# Allegro board IRCAM-1.brd
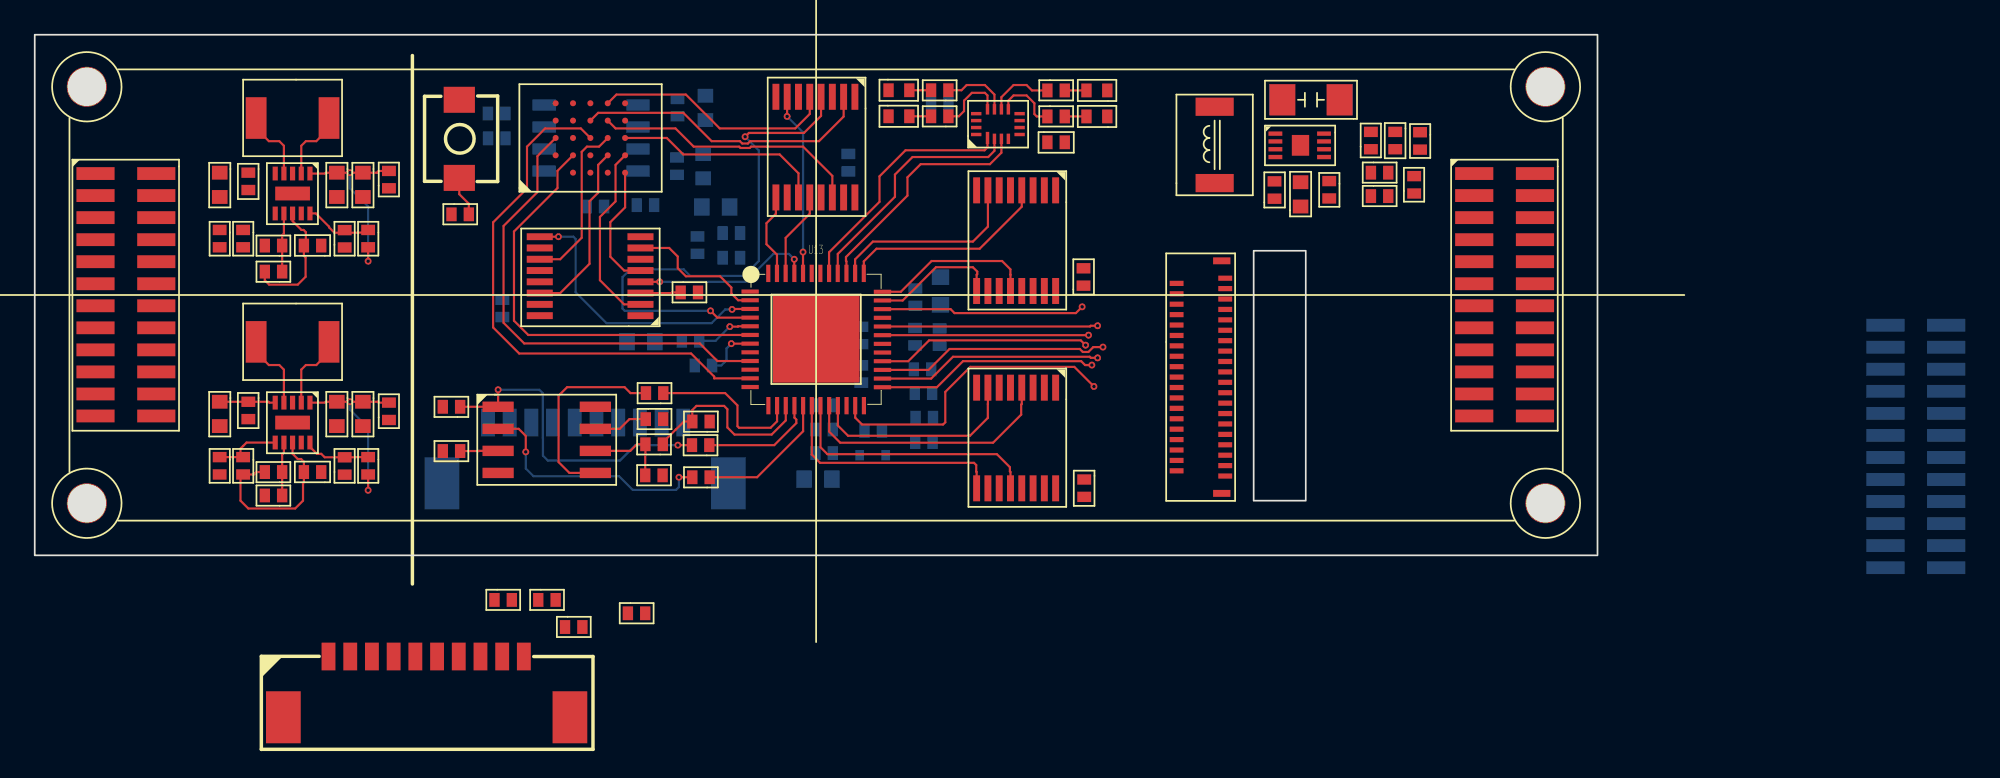
[diagram p0: board, top side]
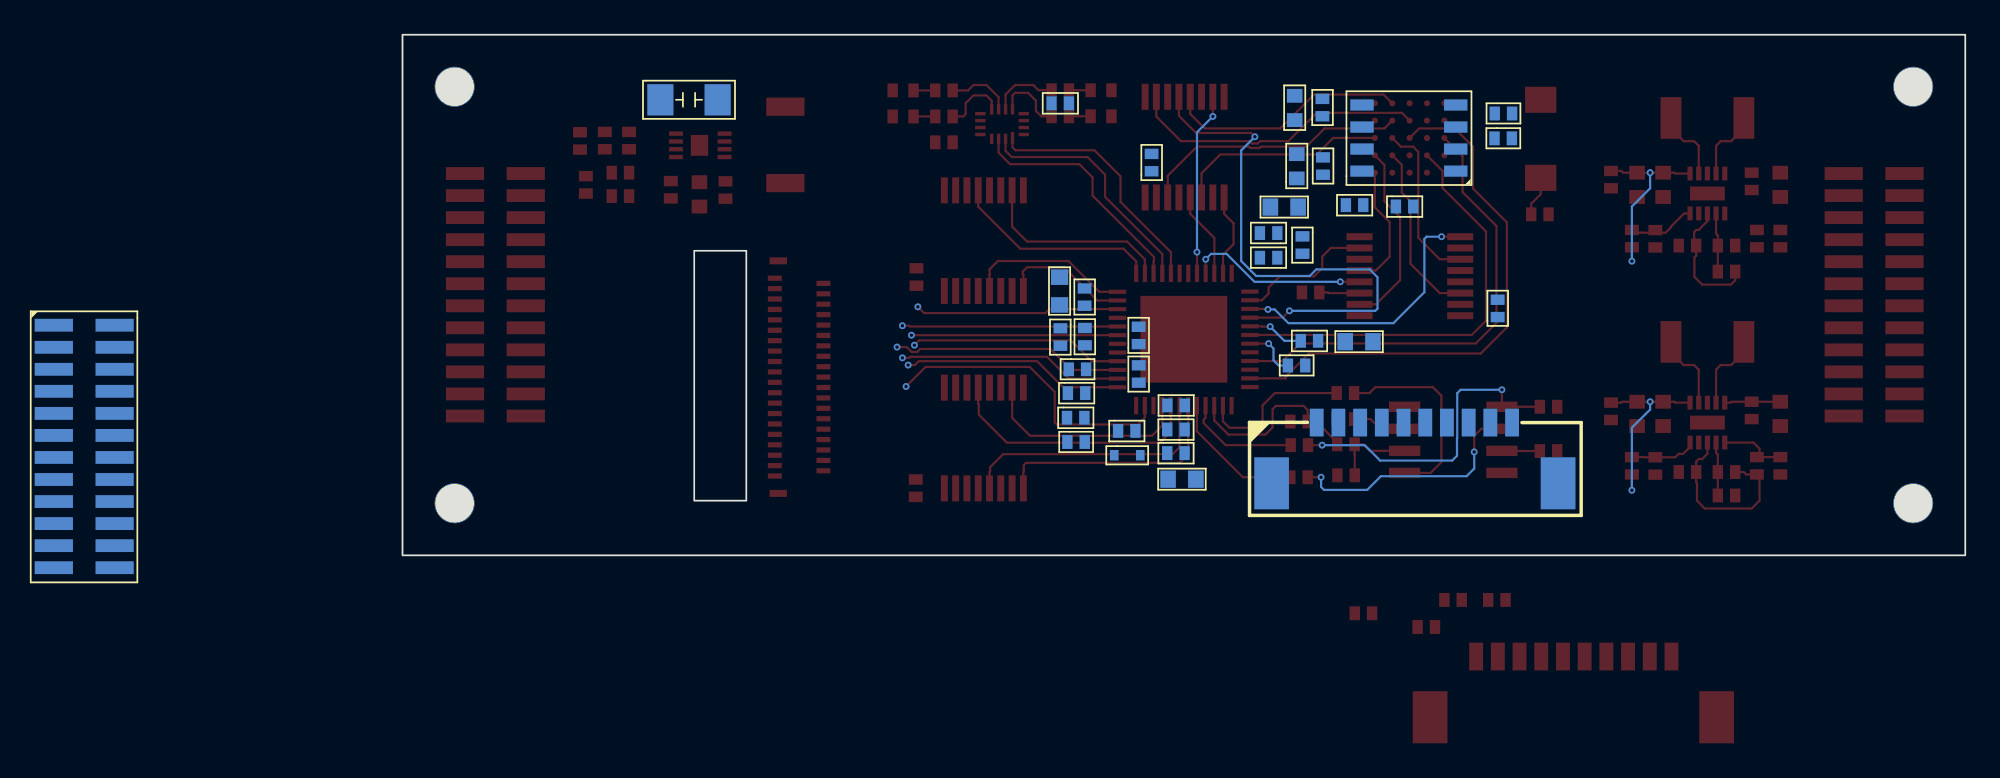
[diagram p1: board, bottom side, seen from below]

Outline 90 x 30 mm; copper layers: TOP, BOTTOM. Coordinates in mm from the lower left corner of the outline.
Outline path: rectangle 0,0 90,30 ; rectangle 70.2,3.15 73.2,17.55

## Design rules (mm)
constraint set DEFAULT: min track width 0.127
net group N101011: nets N101011 N101135
net group GPIO20: nets GPIO20 N100925 N317892 P3V3

## Placement (name value [footprint] x y rotation side)
C33  10nF  [C0402]  45.95 8.64 180 bottom
C34  0.1uF  [C0402]  45.96 7.25 180 bottom
C35  1uF  [C0402]  45.96 5.89 180 bottom
C36  1uF  [C0402]  47.6 10.95 270 bottom
C37  1uF  [C0402]  35.67 20.18 180 bottom
C38  10nF  [C0402]  51.73 7.93 180 bottom
C39  0.1uF  [C0402]  51.68 9.35 180 bottom
C40  10nF  [C0402]  38.27 12.36 180 bottom
C41  0.1uF  [C0402]  47.61 12.17 90 bottom
C42  0.1uF  [C0402]  32.79 20.1 180 bottom
C43  0.1uF  [C0402]  48.79 7.17 180 bottom
C44  0.1uF  [C0402]  26.93 13.73 90 bottom
C45  10nF  [C0402]  50.7 13.1 270 bottom
C46  0.1uF  [C0402]  50.72 14.38 90 bottom
C47  1uF  [C0402]  52.11 13.08 270 bottom
C48  10nF  [C0402]  38.17 18.38 270 bottom
C49  0.1uF  [C0402]  39.62 17.15 0 bottom
C50  1uF  [C0402]  39.62 18.57 0 bottom
C51  0.1uF  [C0402]  37.02 25.3 90 bottom
C52  10uF  [C0603]  38.62 25.08 90 bottom
C53  0.1uF  [C0402]  52.62 26.05 180 bottom
C54  0.1uF  [C0402]  58.32 23.8 0 top
C55  0.1uF  [C0402]  60.44 4.37 270 top
C56  0.1uF  [C0402]  46.86 22.13 90 bottom
C57  0.1uF  [C0402]  36.99 21.93 90 bottom
C58  10uF  [C0603]  38.5 21.72 90 bottom
C59  0.1uF  [C0402]  60.4 15.54 90 top
C72  0.1uF  [C0402]  71.4 20.55 90 top
C73  10uF  [C0603]  72.9 20.1 90 top
C74  33pF  [C0402]  78.35 24.4 270 top
C75  22uF  [C1206]  75.15 26.25 180 top
C76  22uF  [C1206]  75.15 26.25 180 bottom
C96  0.1uF  [C0402]  12.3 22.05 270 top
C97  10uF  [C0603]  10.65 22.05 270 top
C98  0.1uF  [C0402]  16.5 17.85 180 top
C99  10uF  [C0603]  18.9 22.05 270 top
C100  10uF  [C0603]  17.4 22.05 270 top
C101  10uF  [C0603]  10.65 8.85 270 top
C102  0.1uF  [C0402]  12.3 8.85 270 top
C103  10uF  [C0603]  18.9 8.85 270 top
C104  10uF  [C0603]  17.4 8.85 270 top
C105  0.1uF  [C0402]  16.5 4.8 180 top
D2  1N4148WT-7  [SOD-523]  49.01 5.77 180 bottom
D3  LED  [LED0402]  61.77 25.29 180 top
D4  LED  [LED0402]  49.17 25.3 0 top
D5  LED  [LED0402]  49.17 26.8 0 top
D6  LED  [LED0402]  61.77 26.79 180 top
FB1  BLM18PG121SN1D  [L0603]  35.71 12.31 180 bottom
FB2  BLM18PG121SN1D  [L0603]  44.31 4.39 0 bottom
FB3  BLM18PG121SN1D  [L0603]  52.16 14.43 90 bottom
FB4  BLM18PG121SN1D  [L0603]  38.42 20.07 0 bottom
J1  SIP-1x10  [SMD-1D25-10P-DEG0]  37.35 7.65 180 bottom
J9  HiroseFPC  [FH35C-39S-0D3SHW]  68.56 10.27 90 top
J10  SIP-1x10  [SMD-1D25-10P-DEG0]  16.92 -5.83 0 top
J11  CONN-24P  [SMD_CONN_2X12P_1D27]  106.58 13.26 270 bottom
J12  CONN-24P  [SMD_CONN_2X12P_1D27]  86.4 22 270 top
J13  CONN-24P  [SMD_CONN_2X12P_1D27]  7 22 270 top
L7  FXL0420-1R5-M-1.5uH  [SMD_IND_2P_W4D4_L4D2_H1D8]  12.75 25.2 0 top
L9  4.7uH/1A  [IND_SMD_4D4X4D2]  67.95 21.45 90 top
L14  FXL0420-1R5-M-1.5uH  [SMD_IND_2P_W4D4_L4D2_H1D8]  12.75 12.3 0 top
NOREF  -  [unnamed]  87 3 0 top
NOREF#2  -  [#2]  0 0 90 top
NOREF#3  -  [unnamed]  3 27 0 top
NOREF#4  -  [unnamed]  87 27 0 top
NOREF#5  -  [#2]  0 30 0 top
NOREF#6  -  [unnamed]  3 3 0 top
R31  10K  [R0402]  24.5 8.56 180 top
R32  10K  [R0402]  35.16 4.61 0 top
R33  10K  [R0402]  35.19 7.85 0 top
R34  0R  [R0402]  34.16 -3.34 0 top
R35  0R  [R0402]  26.48 -2.57 0 top
R36  0R  [R0402]  29 -2.57 0 top
R37  0R  [R0402]  38.85 6.35 180 top
R38  0R  [R0402]  36.2 9.35 180 top
R39  0R  [R0402]  38.87 4.5 180 top
R40  0R  [R0402]  51.63 10.72 180 bottom
R41  10K  [R0402]  24 19.65 0 top
R42  10K  [R0402]  24.5 6.01 180 top
R43  0R  [R0402]  30.54 -4.13 0 top
R44  100R  [R0402]  51.71 6.53 180 bottom
R45  2.2K  [R0402]  39.01 10.94 180 bottom
R46  4.7K  [R0402]  27.11 24.03 180 bottom
R47  4.7K  [R0402]  27.1 25.46 180 bottom
R48  2.2K  [R0402]  52.62 25.3 180 top
R49  2.2K  [R0402]  52.62 26.8 180 top
R50  2.2K  [R0402]  58.32 26.79 0 top
R51  10K  [R0402]  37.2 15.15 0 top
R53  DNI  [R0402]  76.95 20.7 0 top
R54  1M  [R0402]  76.95 23.4 90 top
R55  DNI  [R0402]  74.55 21.56 270 top
R56  0R  [R0402]  76.95 22.05 0 top
R57  309K  [R0402]  79.78 24.38 270 top
R63  0R  [R0402]  36.17 6.4 180 top
R64  4.7K  [R0402]  38.87 7.71 180 top
R65  2.2K  [R0402]  58.32 25.29 0 top
R66  536K  [R0402]  19.2 18.75 270 top
R67  205K  [R0402]  17.85 17.74 90 top
R68  DNP  [R0402]  20.4 21.15 90 top
R69  0  [R0402]  12 18.75 270 top
R70  DNP  [R0402]  10.65 18.75 270 top
R71  0  [R0402]  14.25 16.35 180 top
R72  DNP  [R0402]  14.25 17.85 180 top
R73  DNP  [R0402]  20.4 7.8 90 top
R74  280K  [R0402]  19.2 5.66 270 top
R75  200K  [R0402]  17.85 4.65 90 top
R76  0  [R0402]  12 5.66 270 top
R77  DNP  [R0402]  10.65 5.66 270 top
R78  0  [R0402]  14.25 4.8 180 top
R79  DNP  [R0402]  14.25 3.45 180 top
R80  DNP  [R0402]  79.44 20.85 90 top
SW1  SW KEY-SPST  [SW_SMD_2P_L3D9_W3D0_P4D5]  24.45 21.75 90 top
U12  W25Q64JW  [SOIC-8]  26.69 8.56 0 top
U13  iCE40UP5K- SG48  [QFN-48]  45 12.45 0 top
U14  TMUX1574PWR  [TSSOP-16]  32.01 16.73 180 top
U15  APS25608N-OBR-BD  [BGA-24]  30 22.05 90 top
U16  SN74AXC4T774RSVR  [UQFN-16]  55.47 24.85 90 top
U17  TMUX1574PWR  [TSSOP-16]  55.87 6.79 270 top
U18  TMUX1574PWR  [TSSOP-16]  44.31 23.55 270 top
U19  M95P32-IXMNT/E  [SO8N]  34.74 22.14 90 bottom
U20  TMUX1574PWR  [TSSOP-16]  55.87 18.16 270 top
U23  LTC3539EDCB-2#TRPBF  [DFN-8]  74.25 24.3 270 top
U27  TPS63030DSKR  [VSON-10]  14.85 20.85 270 top
U28  TPS63030DSKR  [VSON-10]  14.85 7.65 270 top

## Library data of the parts
C33-C59 C96-C105 = CAP NP
C72 C73 = CAP NP: signal model: DEFAULT_CAPACITOR_1e+07pF_2_1
C74 = CAP NP: signal model: DEFAULT_CAPACITOR_33.000000pF_2_1
C75 C76 = CAP NP: signal model: DEFAULT_CAPACITOR_2.2e+07pF_2_1
D2 = DIODE
D3-D6 = LED
FB1-FB4 L7 L14 = INDUCTOR
J1 J10 = SIP-1x10
J9 = HiroseFPC_0
J11-J13 = CONN-24P
L9 = INDUCTOR: signal model: DEFAULT_INDUCTOR_4700nH_2_1
R31-R51 R63-R80 = R
R53 R55 R56 = R: signal model: DEFAULT_RESISTOR_10000OHM_2_1
R54 = R: signal model: DEFAULT_RESISTOR_0.001OHM_2_1
R57 = R: signal model: DEFAULT_RESISTOR_562000OHM_2_1
SW1 = SW KEY-SPST
U12 = W25Q64JW
U13 = iCE40UP5K- SG48
U14 U17 U18 U20 = TMUX1574
U15 = APS25608N-OBR-BD_1
U16 = SN74AXC4T774RSVR
U19 = M95P32-I
U23 = LTC3539EDCB#PBF
U27 U28 = TPS63030DSKR

## Footprints (pads in the part's own frame, mm; a bottom-side part is the same pattern mirrored in y, then rotated)
BGA-24
  round 0.35 smd: A2(1,0) A3(2,0) A4(3,0) A5(4,0) B1(0,-1) B2(1,-1) B3(2,-1) B4(3,-1) B5(4,-1) C1(0,-2) C2(1,-2) C3(2,-2) C4(3,-2) C5(4,-2) D1(0,-3) D2(1,-3) D3(2,-3) D4(3,-3) D5(4,-3) E1(0,-4) E2(1,-4) E3(2,-4) E4(3,-4) E5(4,-4)
C0402
  rect 0.6x0.8 smd: 1(0,0) 2(1,0)
C0603
  rect 0.8x0.9 smd: 1(0,0) 2(1.4,0)
C1206
  rect 1.5x1.8 smd: 1(0,0) 2(3.3,0)
DFN-8
  rect 0.25x0.8 smd: 1(0,-2.8) 2(0.45,-2.8) 3(0.9,-2.8) 4(1.35,-2.8) 5(1.35,0) 6(0.9,0) 7(0.45,0) 8(0,0)
  rect 1.2x1 smd: 9(0.676,-1.355)
FH35C-39S-0D3SHW
  rect 0.3x0.8 smd: 1(-5.7,0) 2(-5.4,2.8) 3(-5.1,0) 4(-4.8,2.8) 5(-4.5,0) 6(-4.2,2.8) 7(-3.9,0) 8(-3.6,2.8) 9(-3.3,0) 10(-3,2.8) 11(-2.7,0) 12(-2.4,2.8) 13(-2.1,0) 14(-1.8,2.8) 15(-1.5,0) 16(-1.2,2.8) 17(-0.9,0) 18(-0.6,2.8) 19(-0.3,0) 20(0,2.8) 21(0.3,0) 22(0.6,2.8) 23(0.9,0) 24(1.2,2.8) 25(1.5,0) 26(1.8,2.8) 27(2.1,0) 28(2.4,2.8) 29(2.7,0) 30(3,2.8) 31(3.3,0) 32(3.6,2.8) 33(3.9,0) 34(4.2,2.8) 35(4.5,0) 36(4.8,2.8) 37(5.1,0) 38(5.4,2.8) 39(5.7,0)
  rect 0.4x1 smd: 40(6.7,0.2) 41(-6.7,0.2)
IND_SMD_4D4X4D2
  rect 1.05x2.2 smd: 1(0,0) 2(4.4,0)
L0603
  rect 0.9x1 smd: 1(0,0) 2(1.6,0)
LED0402
  rect 0.6x0.8 smd: 1(0,0) 2(1.2,0)
QFN-48
  rect 1x0.24 smd: 1(-3.801,2.748) 2(-3.801,2.248) 3(-3.801,1.748) 4(-3.801,1.248) 5(-3.801,0.748) 6(-3.801,0.248) 7(-3.801,-0.252) 8(-3.801,-0.752) 9(-3.801,-1.252) 10(-3.801,-1.752) 11(-3.801,-2.252) 12(-3.801,-2.752) 25(3.822,-2.764) 26(3.822,-2.264) 27(3.822,-1.764) 28(3.822,-1.264) 29(3.822,-0.764) 30(3.822,-0.264) 31(3.822,0.236) 32(3.822,0.736) 33(3.822,1.236) 34(3.822,1.736) 35(3.822,2.236) 36(3.822,2.736)
  rect 0.24x1 smd: 13(-2.748,-3.826) 14(-2.248,-3.826) 15(-1.748,-3.826) 16(-1.248,-3.826) 17(-0.748,-3.826) 18(-0.248,-3.826) 19(0.252,-3.826) 20(0.752,-3.826) 21(1.252,-3.826) 22(1.752,-3.826) 23(2.252,-3.826) 24(2.752,-3.826) 37(2.746,3.797) 38(2.246,3.797) 39(1.746,3.797) 40(1.246,3.797) 41(0.746,3.797) 42(0.246,3.797) 43(-0.254,3.797) 44(-0.754,3.797) 45(-1.254,3.797) 46(-1.754,3.797) 47(-2.254,3.797) 48(-2.754,3.797)
  rect 5x5 smd: 49(0,0)
R0402
  rect 0.6x0.8 smd: 1(0,0) 2(1,0)
SMD-1D25-10P-DEG0
  rect 0.8x1.6 smd: 1(0,0) 2(1.25,0) 3(2.5,0) 4(3.75,0) 5(5,0) 6(6.25,0) 7(7.5,0) 8(8.75,0) 9(10,0) 10(11.25,0)
  rect 2x3 smd: 11(-2.6,-3.5) 12(13.9,-3.5)
SMD_CONN_2X12P_1D27
  rect 0.74x2.2 smd: 1(0,-3.5) 2(1.27,-3.5) 3(2.54,-3.5) 4(3.81,-3.5) 5(5.08,-3.5) 6(6.35,-3.5) 7(7.62,-3.5) 8(8.89,-3.5) 9(10.16,-3.5) 10(11.43,-3.5) 11(12.7,-3.5) 12(13.97,-3.5) 13(13.97,0) 14(12.7,0) 15(11.43,0) 16(10.16,0) 17(8.89,0) 18(7.62,0) 19(6.35,0) 20(5.08,0) 21(3.81,0) 22(2.54,0) 23(1.27,0) 24(0,0)
SMD_IND_2P_W4D4_L4D2_H1D8
  rect 1.2x2.4 smd: 1(0,0) 2(4.2,0)
SO8N
  rect 0.65x1.35 smd: 1(0,-5.4) 2(1.27,-5.4) 3(2.54,-5.4) 4(3.81,-5.4) 5(3.81,0) 6(2.54,0) 7(1.27,0) 8(0,0)
SOD-523
  rect 0.5x0.6 smd: 1(0,0) 2(1.5,0)
SOIC-8
  rect 1.8x0.6 smd: 1(0,0) 2(0,-1.27) 3(0,-2.54) 4(0,-3.81) 5(5.6,-3.81) 6(5.6,-2.54) 7(5.6,-1.27) 8(5.6,0)
SW_SMD_2P_L3D9_W3D0_P4D5
  rect 1.5x1.8 smd: 1(0,0) 2(4.5,0)
TSSOP-16
  rect 1.5x0.4 smd: 1(-2.872,2.924) 2(-2.872,2.274) 3(-2.872,1.624) 4(-2.872,0.974) 5(-2.872,0.324) 6(-2.872,-0.326) 7(-2.872,-0.976) 8(-2.872,-1.626) 9(2.928,-1.626) 10(2.928,-0.976) 11(2.928,-0.326) 12(2.928,0.324) 13(2.928,0.974) 14(2.928,1.624) 15(2.928,2.274) 16(2.928,2.924)
unnamed
  round 2.3 hole 2.2 unplated: (0,0)
UQFN-16
  rect 0.7x0.2 smd: 1(-0.8,0.6)
  rect 0.6x0.2 smd: 2(-0.85,0.2) 3(-0.85,-0.2) 4(-0.85,-0.6) 9(0.85,-0.6) 10(0.85,-0.2) 11(0.85,0.2) 12(0.85,0.6)
  rect 0.2x0.6 smd: 5(-0.6,-1.25) 6(-0.2,-1.25) 7(0.2,-1.25) 8(0.6,-1.25) 13(0.6,1.25) 14(0.2,1.25) 15(-0.2,1.25) 16(-0.6,1.25)
VSON-10
  rect 0.8x0.3 smd: 1(-1.15,1) 2(-1.15,0.5) 3(-1.15,0) 4(-1.15,-0.5) 5(-1.15,-1) 6(1.15,-1) 7(1.15,-0.5) 8(1.15,0) 9(1.15,0.5) 10(1.15,1)
  rect 0.8x2 smd: 11(0,0)

## Nets
GND: C33.2 C34.2 C35.2 C36.2 C37.2 C38.2 C39.2 C40.2 C41.2 C42.2 C43.2 C44.2 C45.2 C46.2 C47.2 C48.2 C49.2 C50.2 C51.2 C52.2 C53.2 C54.2 C55.2 C56.2 C57.2 C58.2 C59.2 C72.1 C73.1 C75.2 C76.2 C96.2 C97.2 C98.1 C99.2 C100.2 C101.2 C102.2 C103.2 C104.2 C105.1 D3.1(CATHODE) D4.1(CATHODE) D5.1(CATHODE) D6.1(CATHODE) J1.6 J1.7 J1.11 J1.12 J9.4 J9.5 J9.12 J9.30 J9.33 J9.36 J9.39 J9.40 J9.41 J10.3 J10.7 J10.11 J10.12 J11.2 J11.23 J12.1 J12.2 J12.3 J12.4 J12.5 J12.6 J12.7 J12.8 J12.9 J12.10 J12.11 J12.12 J12.23 J13.3 J13.4 J13.7 J13.8 J13.17 J13.18 J13.21 J13.22 R56.2 R57.1 R64.1 R67.1 R72.2 R75.1 R79.2 SW1.2 U12.4 U13.49 U14.8 U15.C1 U15.E5(VSS#E5) U16.7 U16.8 U17.8 U18.8 U19.4 U20.8 U23.2 U23.3 U23.9 U27.3 U27.9 U27.11 U28.3 U28.9 U28.11
P1V2: FB1.2 R44.2 R73.1
P1V8: C37.1 C42.1 C44.1 C51.1 C52.1 C54.1 C55.1 C56.1 C57.1 C58.1 C59.1 FB2.1 FB3.2 FB4.1 J1.8 J1.9 J1.10 J10.4 J10.8 R31.2 R32.2 R33.2 R41.1 R42.2 R45.2 R46.2 R47.2 R51.2 R68.1 U12.8 U14.15 U14.16(VDD) U15.D1 U15.E4 U16.5 U16.6 U16.14 U16.15 U16.16 U17.15 U17.16(VDD) U18.15 U18.16(VDD) U19.8 U20.15 U20.16(VDD)
P3V3: C53.1 C72.2 C73.2 C96.1 C97.1 C101.1 C102.1 D2.2 J11.1 J11.24 J12.24 J13.1 J13.2 J13.23 J13.24 L9.1 R53.2 R55.2 U16.13(VCCB) U23.4 U27.5 U28.5
VCC: C36.1 C40.1 C41.1 FB1.1 U13.5 U13.30
VCCIO_0: C45.1 C46.1 C47.1 FB3.1 U13.33
VCCIO_2: C48.1 C49.1 C50.1 FB4.2 U13.1
CFG2_IO1: J11.9 J12.16
CFG2_IO2: J11.10 J12.15
CFG_IO1: J11.16 U20.3
CFG_IO2: J11.15 U20.6
CFG_SPI_CLK: U14.6 U19.6
CFG_SPI_CS: R51.1 U14.3 U19.1
CFG_SPI_D0: U14.10 U19.5
CFG_SPI_D1: U18.13 U19.2
CFG_SPI_D2: U18.3 U19.3(W\-DQ2)
CFG_SPI_D3: U18.10 U19.7
DBG_RX: J10.2 R36.2
DBG_TX: J10.1 R43.2
DONE_LED: R45.1 U13.7 U16.4
FLASH_CLK: R32.1 R63.2 U12.6
FLASH_CS: R31.1 R37.2 U12.1
FLASH_MISO: R39.2 U12.2
FLASH_MOSI: R38.2 U12.5
FLASH_RST: R33.1 U12.7
FLASH_WP: R42.1 U12.3(W\P\(IO2))
GPIO1: J9.13 U17.2
GPIO2: J9.14 U17.5
GPIO3: J9.15 U17.11
GPIO4: J9.16 U17.14
GPIO5: J9.17 U20.2
GPIO6: J9.18 U20.5
GPIO7: J9.19 U20.11
GPIO8: J9.20 U20.14
GPIO9: J9.21 U13.43
GPIO10: J9.22 U13.31
GPIO11: J9.23 U13.42
GPIO12: J9.24 U13.34
GPIO13: J9.25 U13.28
GPIO14: J9.26 U13.32
GPIO15: J9.27 U13.12
GPIO16: J9.28 U13.27
GPIO17: J9.29 U13.13
GPIO18: J9.7 U13.25
GPIO19: J9.6 U13.23
GPIO20: R55.1 U13.26 U23.5
ICE_RST: J1.5 R41.2 SW1.1 U13.8
ICE_SCK: J1.2 R35.1 R63.1 R64.2 U13.15
ICE_SI: J1.3 R39.1 R43.1 U13.17
ICE_SO: J1.4 R36.1 R38.1 U13.14
ICE_SS: J1.1 R34.1 R37.1 U13.16
IN_GPIO1: U13.20 U17.4
IN_GPIO2: U13.21 U17.7
IN_GPIO3: U13.18 U17.9
IN_GPIO4: U13.19 U17.12
IN_GPIO5: U13.37 U20.4
IN_GPIO6: U13.38 U20.7
IN_GPIO7: U13.35 U20.9
IN_GPIO8: U13.36 U20.12
IN_SRAM_D0: U13.3 U14.9
IN_SRAM_D1: U13.48 U14.12
IN_SRAM_D2: U13.4 U18.4
IN_SRAM_D3: U13.46 U18.12
IN_SRAM_D4: U13.44 U18.7
IN_SRAM_D5: U13.47 U18.9
IN_SRAM_D6: U13.45 U14.4
IN_SRAM_D7: U13.2 U14.7
IR_5V0: J9.1 J9.2 J9.3(VDD50#3) R80.1
MUX_SEL1: R34.2 U17.1 U20.1
MUX_SEL2: R35.2 U14.1 U18.1
NC.: U15.A2 U15.A5 U15.B1 U15.B3 U15.B4 U15.B5 U15.C5
PSRAM_ADQ0: U14.11 U15.D3
PSRAM_ADQ1: U14.14 U15.D2
PSRAM_ADQ2: U15.C4 U18.2
PSRAM_ADQ3: U15.D4 U18.14
PSRAM_ADQ4: U15.D5 U18.5
PSRAM_ADQ5: U15.E3 U18.11
PSRAM_ADQ6: U14.2 U15.E2
PSRAM_ADQ7: U14.5 U15.E1
PSRAM_CE: R46.1 U13.9 U15.A3
PSRAM_CLK: U13.6 U15.B2
PSRAM_DQS: U13.11 U15.C3
PSRAM_RST: R47.1 U13.10 U15.A4
RFU: U15.C2
SHDN: J11.21 R70.2 R77.2
SHDN2: J11.4 J12.21
SPI_VCCIO1: C33.1 C34.1 C35.1 FB2.2 U13.22
UART_RX: J10.6
UART_TX: J10.5
UP_RX2: J11.7 J12.18
UP_TX2: J11.6 J12.19
UP_UART_RX: J11.18 U17.6
UP_UART_TX: J11.19 U17.3
UPLD_DONE: J11.20 U17.10
UPLD_DONE2: J11.5 J12.20
VCAP: J13.5 J13.6 J13.19 J13.20
WAKE_UP: J11.22
WAKE_UP2: J11.3 J12.22
N14095: C38.1 C39.1 R40.1 R44.1
N14165: R40.2 U13.29
N14245: C43.1 D2.1(K) U13.24(VPP_2V5)
N100925: L9.2 U23.1
N101011: C74.1 C75.1 C76.1 R54.2 R80.2 U23.8(VOUT)
N101135: C74.2 R54.1 R57.2 U23.6
N317892: R53.1 R56.1 U23.7
N380499: R50.1 U16.10
N380506: R49.1 U16.11
N380513: R48.1 U16.12
N380604: D6.2 R50.2
N380608: D5.2 R49.2
N380612: D4.2 R48.2
N467283: D3.2 R65.2
N467591: R65.1 U16.9
N469791: L7.1 U27.4
N469803: L7.2 U27.2
N471379: C98.2 R69.2 R71.2 U27.8
N472703: R66.1 R67.2 U27.10
N472718: C99.1 C100.1 R66.2 R68.2 U27.1(VOUT)
N476340: R69.1 R70.1 U27.6
N477844: R71.1 R72.1 U27.7
N481384: L14.1 U28.4
N481392: L14.2 U28.2
N481444: C103.1 C104.1 R73.2 R74.2 U28.1(VOUT)
N481654: C105.2 R76.2 R78.2 U28.8
N481662: R74.1 R75.2 U28.10
N481698: R76.1 R77.1 U28.6
N481730: R78.1 R79.1 U28.7
N550175: U13.41 U16.1
N550200: U13.40 U16.2
N550204: U13.39 U16.3

Pads without a net: J9 8 9 10 11 31 32 34 35 37 38; J10 9 10; J11 8 11 12 13 14 17; J12 13 14 17; J13 9 10 11 12 13 14 15 16; U14 13; U17 13; U18 6; U20 10 13

## Via types
v1: diameter 0.4, hole 0.2, TOP to BOTTOM, 26 vias

## Routing (per net, layer and track width the routed paths; a pad name or vN(x,y) marks a point on that pad's centre or on a via; arc(x,y) is an arc through that point)
P3V3: length 3.2
  TOP w0.127: C101.1 C102.1 13.46,8.85 13.51,8.8 U28.5
VCC: length 3.3
  TOP w0.127: v1(40.03,13.18) 40.49,13.18 40.51,13.2 U13.5
  BOTTOM w0.127: v1(40.03,13.18) 39.21,12.36 C40.1
CFG_SPI_CS: length 2.3
  TOP w0.127: 34.88,15.11 36.67,15.11 36.71,15.15 R51.1
DONE_LED: length 3.1
  TOP w0.127: U13.7 v1(40.12,12.2)
  BOTTOM w0.127: R45.1 39.54,10.94 39.84,11.24 39.84,11.92 v1(40.12,12.2)
FLASH_CLK: length 4.8
  TOP w0.127: U12.6 34.3,6.02 34.68,6.4 R63.2 35.17,5.81 35.16,5.8 R32.1
FLASH_CS: length 18.5
  TOP w0.127: R37.2 v1(37.04,6.35) ; R31.1 U12.1 v1(26.69,9.54)
  BOTTOM w0.127: v1(37.04,6.35) 34.59,6.35 33.7,5.46 29.55,5.46 29.27,5.74 29.27,6.76 29.26,6.77 29.26,9.34 29.06,9.54 v1(26.69,9.54)
FLASH_MISO: length 14.4
  TOP w0.127: R39.2 v1(37.1,4.5) ; v1(28.28,5.96) 28.28,6.88 27.87,7.29 U12.2
  BOTTOM w0.127: v1(28.28,5.96) 28.28,5 28.72,4.56 33.65,4.56 34.44,3.77 36.93,3.77 37.1,3.94 v1(37.1,4.5)
FLASH_MOSI: length 11.6
  TOP w0.127: R38.2 34.31,9.35 33.97,9.69 30.66,9.69 30.17,9.2 30.17,5.37 30.79,4.75 U12.5
FLASH_RST: length 3.1
  TOP w0.127: U12.7 33.69,7.29 34.25,7.85 R33.1
FLASH_WP: length 2.2
  TOP w0.127: U12.3 25.6,6.02 25.59,6.01 R42.1
GPIO10: length 11.9
  TOP w0.127: v1(60.69,12.69) U13.31
GPIO12: length 11.7
  TOP w0.127: v1(60.32,14.32) 59.96,13.96 52.97,13.96 52.74,14.19 U13.34
GPIO13: length 12.3
  TOP w0.127: v1(60.52,12.11) 60.24,12.39 51.51,12.39 50.31,11.19 U13.28
GPIO14: length 12.4
  TOP w0.127: U13.32 60.78,13.19 60.82,13.23 v1(61.21,13.23)
GPIO16: length 13.4
  TOP w0.127: U13.27 51.48,10.69 52.68,11.89 60.19,11.89 60.36,11.72 60.68,11.72 60.96,12 v1(61.52,12)
GPIO18: length 12.8
  TOP w0.127: v1(60.88,10.96) 60.49,10.96 60.26,11.19 53.46,11.19 51.96,9.69 U13.25
GPIO19: length 17.5
  TOP w0.127: v1(61,9.73) 59.87,10.86 53.88,10.86 52.44,9.42 52.44,7.67 52.31,7.54 47.65,7.54 47.25,7.93 U13.23
GPIO20: length 12.9
  TOP w0.127: U13.26 51.63,10.19 52.88,11.44 60.76,11.44 60.82,11.38 v1(61.21,11.38)
ICE_RST: length 2.3
  TOP w0.127: SW1.1 24.45,20.81 25,20.26 R41.2
ICE_SCK: length 10.9
  TOP w0.127: U13.15 43.25,7.77 42.44,6.96 40.3,6.96 39.89,7.37 39.89,8.42 39.7,8.61 38.11,8.61 37.87,8.37 R64.2 37.38,7.71 36.92,7.25 36.17,6.5 R63.1
ICE_SI: length 8
  TOP w0.127: U13.17 44.25,7.15 41.6,4.5 R39.1
ICE_SO: length 9.1
  TOP w0.127: R38.1 39.76,9.35 40.47,8.64 40.47,7.44 40.56,7.35 42.38,7.35 42.75,7.72 U13.14
ICE_SS: length 6.6
  TOP w0.127: R37.1 42.59,6.35 43.86,7.62 43.86,7.83 43.75,7.93 U13.16
IN_GPIO1: length 15.1
  TOP w0.127: U13.20 45.75,7.13 46.39,6.49 55.19,6.49 56.81,8.11 56.81,8.69 56.84,8.72 U17.4
IN_GPIO2: length 12.2
  TOP w0.127: U17.7 54.89,8.72 54.89,8.72 54.89,7.92 53.86,6.89 46.84,6.89 46.25,7.48 U13.21
IN_GPIO3: length 13.9
  TOP w0.127: U13.18 44.75,5.81 45.23,5.33 54.09,5.33 54.22,5.2 54.22,4.83 54.24,4.8 U17.9
IN_GPIO4: length 15
  TOP w0.127: U13.19 45.25,6.23 45.65,5.83 55.41,5.83 56.16,5.08 56.16,4.84 56.19,4.8 U17.12
IN_GPIO5: length 12
  TOP w0.127: U13.37 47.75,16.94 48.48,17.67 54.42,17.67 56.84,20.09 U20.4
IN_GPIO6: length 11.3
  TOP w0.127: U20.7 54.89,18.94 54.03,18.08 48.27,18.08 47.25,17.06 U13.38
IN_GPIO7: length 7.5
  TOP w0.127: U13.35 49.99,14.69 51.9,16.6 54.03,16.6 54.28,16.35 54.28,16.21 54.24,16.17 U20.9
IN_GPIO8: length 9.6
  TOP w0.127: U20.12 56.19,16.17 56.19,16.18 56.19,16.48 55.71,16.96 51.65,16.96 49.88,15.19 U13.36
IN_SRAM_D0: length 16.3
  TOP w0.127: v1(40.16,14.17) 40.19,14.2 U13.3 ; U14.9 v1(30.16,18.36)
  BOTTOM w0.127: v1(30.16,18.36) 31.02,18.36 31.15,18.23 31.15,15.16 32.93,13.38 38.98,13.38 39.77,14.17 v1(40.16,14.17)
IN_SRAM_D2: length 31.4
  TOP w0.127: U13.4 39.31,13.7 v1(38.92,14.09) ; v1(40.91,24.12) 41.13,24.34 44.3,24.34 45.28,25.32 U18.4
  BOTTOM w0.127: v1(38.92,14.09) 33.98,14.09 33.85,14.22 33.85,16.03 34.3,16.48 37.37,16.48 37.75,16.1 40.84,16.1 41.7,16.96 41.7,23.33 v1(40.91,24.12)
IN_SRAM_D3: length 4.9
  TOP w0.127: U13.46 43.25,18.29 44.63,19.68 U18.12
IN_SRAM_D4: length 10.6
  TOP w0.127: U13.44 v1(44.25,17.48) ; v1(43.33,25.29) 43.33,26.42 U18.7
  BOTTOM w0.127: v1(44.25,17.48) 44.25,24.37 v1(43.33,25.29)
IN_SRAM_D5: length 4.9
  TOP w0.127: U13.47 42.75,17.32 42.14,17.93 42.14,19.14 42.68,19.68 U18.9
IN_SRAM_D6: length 10.5
  TOP w0.127: U13.45 43.74,16.25 v1(43.74,17.06) ; U14.4 v1(35.99,15.76)
  BOTTOM w0.127: v1(43.74,17.06) 43.43,17.37 42.54,17.37 40.93,15.76 v1(35.99,15.76)
IN_SRAM_D7: length 8.2
  TOP w0.127: U13.2 40.51,14.7 40.12,15.09 40.12,15.43 39.47,16.08 37.5,16.08 37.03,16.55 37.03,17.22 36.54,17.71 34.88,17.71
PSRAM_ADQ0: length 9.7
  TOP w0.127: U14.11 30.26,17.06 31.5,18.3 31.5,23.25 31.8,23.55 32.5,23.55 U15.D3
PSRAM_ADQ1: length 10.3
  TOP w0.127: U15.D2 32.45,22.5 32.45,20.9 31.95,20.4 31.95,16.8 30.26,15.11 29.08,15.11
PSRAM_ADQ2: length 17.3
  TOP w0.127: U18.2 46.58,25.28 45.17,23.87 41.21,23.87 41.07,23.73 40.75,23.73 40.61,23.87 38.98,23.87 37.35,25.5 32.45,25.5 U15.C4
PSRAM_ADQ3: length 15.6
  TOP w0.127: U18.14 45.93,21.87 44.25,23.55 41.25,23.55 41.18,23.48 40.64,23.48 40.57,23.55 37.95,23.55 36.9,24.6 33.45,24.6 U15.D4
PSRAM_ADQ4: length 14
  TOP w0.127: U15.D5 33.5,26.55 37.5,26.55 39.45,24.6 43.8,24.6 44.63,25.43 U18.5
PSRAM_ADQ5: length 12.2
  TOP w0.127: U15.E3 36.4,24.05 37.35,23.1 42.9,23.1 43.98,22.02 U18.11
PSRAM_ADQ6: length 10.7
  TOP w0.127: U14.2 33.94,14.46 32.55,15.85 32.55,19.5 33.45,20.4 33.45,22.5 U15.E2
PSRAM_ADQ7: length 7.3
  TOP w0.127: U15.E1 34,20.05 33.15,19.2 33.15,17.2 33.94,16.41 U14.5
PSRAM_CE: length 27
  TOP w0.127: U15.A3 28.95,23 28.95,20.93 27,18.98 27,13.4 28.19,12.21 38.3,12.21 39.31,11.2 U13.9
PSRAM_CLK: length 24.9
  TOP w0.127: U13.6 28.42,12.7 27.6,13.52 27.6,18.66 30.11,21.17 30.11,22.16 U15.B2
PSRAM_DQS: length 31.6
  TOP w0.127: U15.C3 31.45,24.6 29.4,24.6 28.35,23.55 28.35,21.14 26.4,19.19 26.4,13.13 27.9,11.63 37.8,11.63 39.13,10.3 39.13,10.2 U13.11
N380499: length 3.8
  TOP w0.127: R50.1 57.43,26.79 57.12,27.1 56.37,27.1 55.67,26.4 U16.10
N380506: length 3.9
  TOP w0.127: U16.11 55.27,26.55 54.72,27.1 53.67,27.1 53.37,26.8 R49.1
N380513: length 4
  TOP w0.127: U16.12 54.87,26.5 54.72,26.65 53.97,26.65 53.52,26.2 53.52,25.6 53.22,25.3 R48.1
N380604: length 1.2
  TOP w0.127: R50.2 D6.2
N380608: length 1.2
  TOP w0.127: R49.2 D5.2
N380612: length 1.2
  TOP w0.127: R48.2 D4.2
N467283: length 1.2
  TOP w0.127: R65.2 D3.2
N467591: length 3.7
  TOP w0.127: R65.1 57.71,25.29 57.57,25.43 57.57,26.05 57.12,26.5 56.37,26.5 56.07,26.2 U16.9
N469791: length 4.2
  TOP w0.127: U27.4 14.35,23.6 14.08,23.87 13.48,23.87 12.75,24.6 L7.1
N469803: length 4.2
  TOP w0.127: L7.2 16.95,24.6 16.22,23.87 15.62,23.87 15.35,23.6 U27.2
N471379: length 7.6
  TOP w0.127: 13.25,16.5 R71.2 13.25,15.85 13.5,15.6 15.15,15.6 15.6,16.05 15.6,17.16 15.5,17.26 C98.2 15.61,17.96 15.61,18.62 15.49,18.75 15.36,18.75 14.85,19.26 U27.8 14.85,19.85
N472703: length 3.8
  TOP w0.127: 19.2,18.6 18.61,18.6 18.6,18.59 17.26,18.59 16.95,18.9 16.95,18.94 16.19,19.7 U27.10
N472718: length 11.1
  TOP w0.127: U27.1 16.71,22 16.76,22.05 C100.1 v1(18.15,22.05) C99.1 19.71,22.05 19.81,22.15 R68.2 ; R66.2 v1(19.2,16.95)
  BOTTOM w0.127: v1(19.2,16.95) 19.2,20.1 18.15,21.15 v1(18.15,22.05) 18.15,22.2
N477844: length 3.4
  TOP w0.127: 14.25,16.5 R72.1 14.25,18.44 14.35,18.54 U27.7 14.35,19.85
N481384: length 4.5
  TOP w0.127: L14.1 12.75,11.7 13.48,10.97 14.08,10.97 14.35,10.7 U28.4
N481392: length 4.5
  TOP w0.127: U28.2 15.35,10.7 15.62,10.97 16.22,10.97 16.95,11.7 L14.2
N481444: length 11
  TOP w0.127: R73.2 19.81,8.8 19.76,8.85 C103.1 v1(18.15,8.85) C104.1 16.76,8.85 16.71,8.8 U28.1 ; R74.2 v1(19.2,3.75)
  BOTTOM w0.127: v1(18.15,8.85) 18.15,8.4 19.2,7.35 v1(19.2,3.75)
N481654: length 10.7
  TOP w0.127: R78.2 12.76,4.8 12.62,4.66 R76.2 11.85,4.66 11.85,3.15 12.3,2.7 15,2.7 15.45,3.15 15.45,4.16 15.5,4.21 C105.2 15.5,5.39 15.34,5.55 15.15,5.55 14.85,5.85 U28.8
N481662: length 3.9
  TOP w0.127: U28.10 15.85,6.25 16.25,5.85 16.5,5.85 16.7,5.65 R75.2 18.44,5.65 18.45,5.66 R74.1
N481698: length 4
  TOP w0.127: 10.5,5.66 R77.1 11.85,5.66 11.85,6.15 12,6.3 12.2,6.5 U28.6
N481730: length 3.1
  TOP w0.127: R79.1 R78.1 14.25,5.81 14.35,5.91 U28.7
N550175: length 14.2
  TOP w0.127: U13.41 45.75,17.47 48.65,20.37 48.65,21.84 50.15,23.34 54.7,23.34 54.87,23.51 U16.1
N550200: length 14
  TOP w0.127: U13.40 46.25,17.37 49.54,20.66 49.54,21.94 50.55,22.95 54.91,22.95 55.27,23.31 U16.2
N550204: length 13.8
  TOP w0.127: U13.39 46.75,16.94 46.72,16.96 46.72,17.19 50.26,20.73 50.26,21.78 51.02,22.54 55.01,22.54 55.67,23.2 U16.3
